# Altium PCB 1000BASET1_MEDIA_CONVERTER.PcbDoc (part 2 of 2)
Units mm, origin at the board's own origin, x right, y up, seen from the top; angles counter-clockwise.
Board outline 96 x 40 mm, 4 copper layers (Top Layer, Mid Layer 1, Mid Layer 2, Bottom Layer), stack 1.586 mm thick; 186 components, 118 nets, 607 pads, 487 vias.
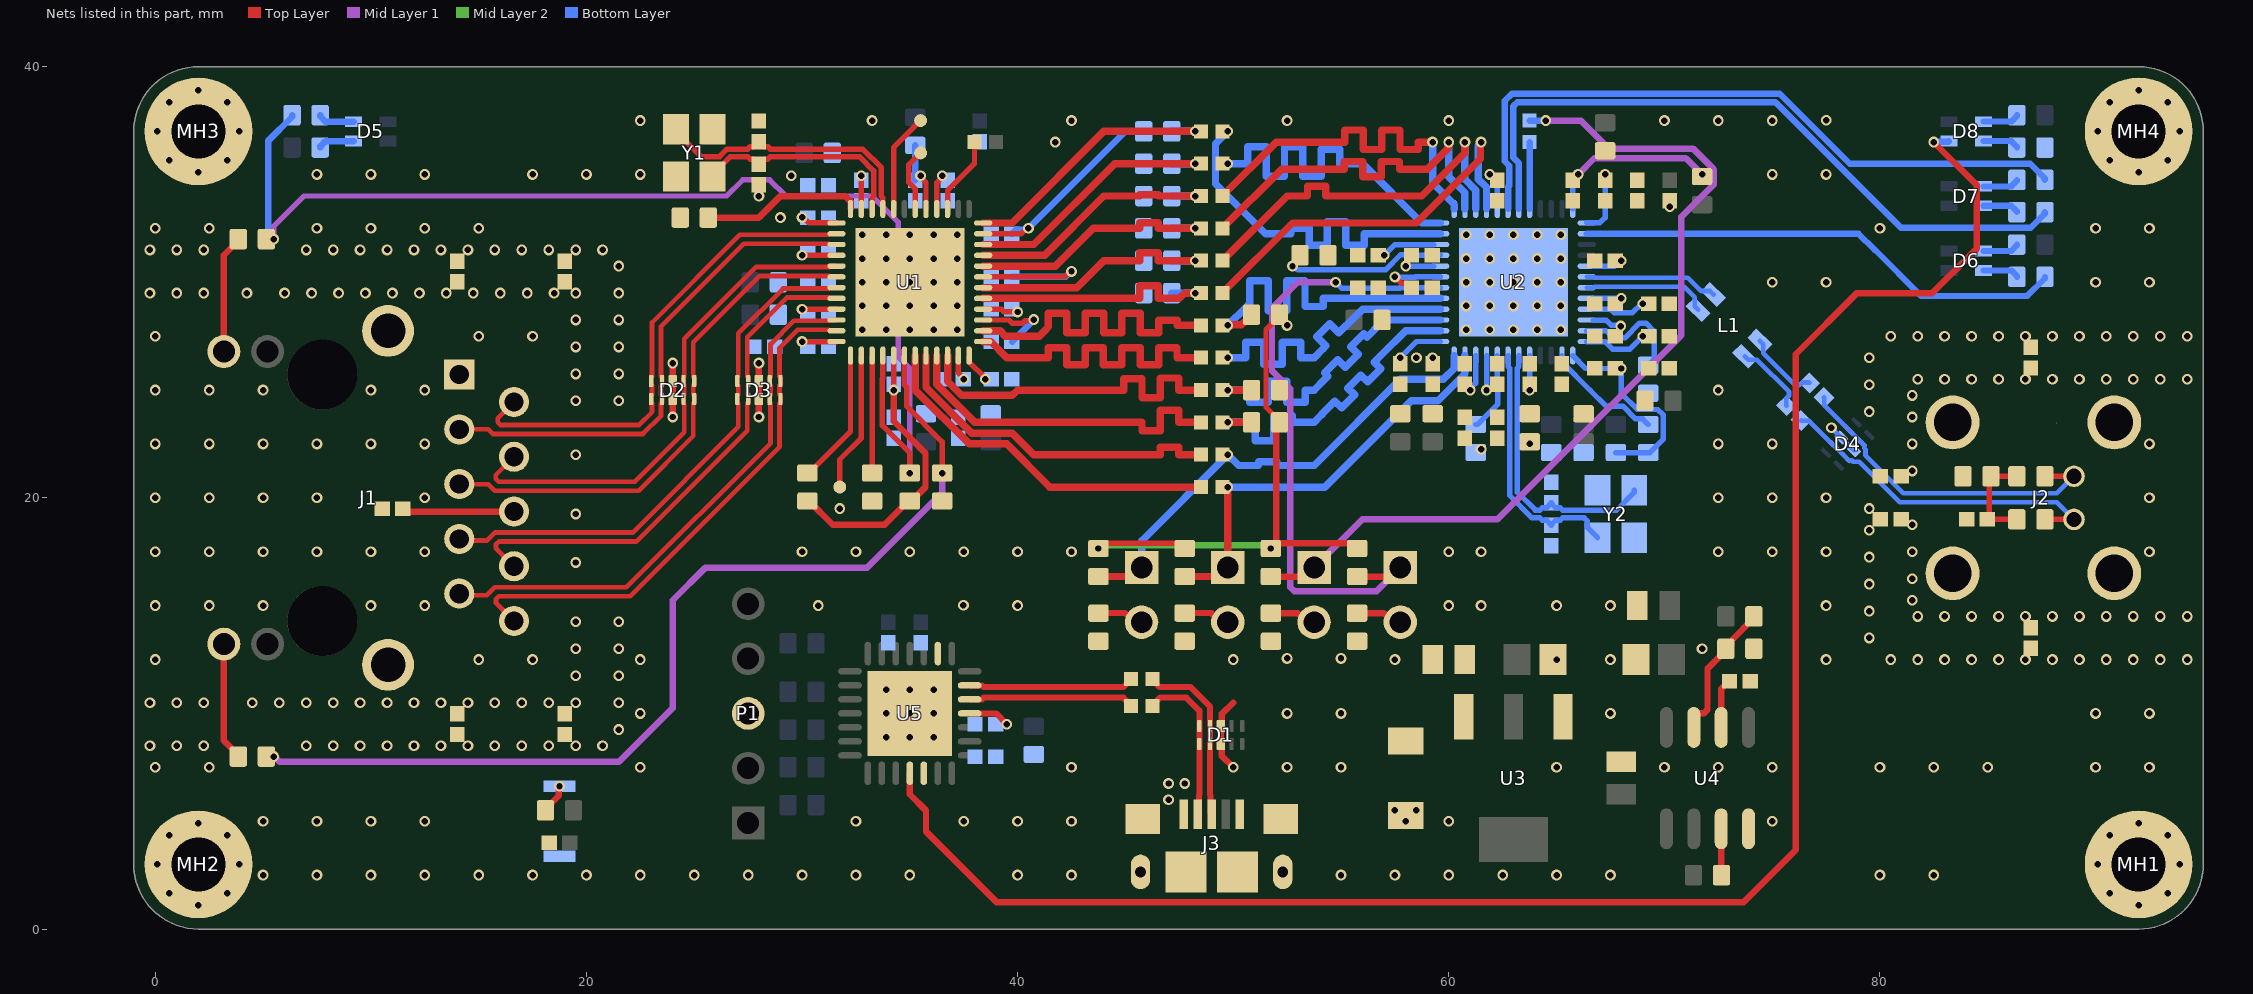
[diagram p4: the nets of this part, all layers, seen from the top]

## Via types
v1: diameter 0.5, hole 0.3, Top Layer to Bottom Layer, tented both sides, 372 vias
v2: diameter 0.5, hole 0.3, Top Layer to Bottom Layer, 115 vias

## Nets (pads, with @x,y where several pads share a name; then routed paths per layer and width w, separated by ;. In a path a pad name is that pad's centre, name@x,y a point inside that pad or via, vN(x,y) a via of type N, cw(c..) or ccw(c..) an arc to the next point about the centre after c; other vN are vias at no path point) (continued)
GND: C2.2 C3.2 C4.2 C5.2 C6.2 C7.2 C8.2 C9.2 C10.2 C11.2 C12.2 C13.2 C14.2 C15.2 C16.2 C17.2 C18.2 C19.2 C20.2 C21.2 C22.2 C23.2 C24.2 C25.2 C26.2 C27.2 C30.2 C31.2 C32.2 C34.2 C35.2 C36.2 C37.2 C38.2 C39.2 C40.2 C41.2 C42.2 C43.2 C44.2 C45.2 C46.2 C47.2 C48.2 C49.2 C50.2 C51.2 C52.2 C53.2 C54.2 C55.2 C56.2 C57.2 C58.2 C59.2 C60.2 C61.2 C62.2 C63.2 C64.2 C65.2 C66.2 C67.2 C68.2 C69.2 C70.2 C81.2 D1.3 D1.8 D2.3 D2.8 D3.3 D3.8 D4.3 D4.8 J3.5 J3.6 J3.7 J3.8 J3.9 J3.10 J3.11 MH1.1 MH1.2 MH1.3 MH1.4 MH1.5 MH1.6 MH1.7 MH2.1 MH2.2 MH2.3 MH2.4 MH2.5 MH2.6 MH2.7 MH3.1 MH3.2 MH3.3 MH3.4 MH3.5 MH3.6 MH3.7 MH4.1 MH4.2 MH4.3 MH4.4 MH4.5 MH4.6 MH4.7 P1.3 R22.1 R23.1 R24.1 R25.1 R27.1 R29.1 R30.1 R35.2 R41.2 R42.2 R45.1 R46.1 R55.1 R56.1 R57.1 R62.2 R69.2 R70.2 R73.1 R75.1 SW1.2 U1.49 U2.49 U3.1 U4.4 U5.5 U5.16 U5.29 Y1.2 Y1.4 Y2.2 Y2.4 | length 10
  Top Layer w0.3: v1(24.005,23.75) 24.002,23.752 24.002,24.58 D2.3@24,24.583 D2.8@24,25.418 24.002,25.42 24.002,26.248 v1(24.005,26.25) ; v1(28,23.75) v1(28,26.25) ; v1(50,7.5) 49.475,8.025 49.475,8.533 D1.3@49.425,8.582 D1.8@49.425,9.417 49.475,9.467 49.475,9.975 50,10.5
  Bottom Layer w0.218: v1(77.75,23.25) D4.8@78.795,22.205
  other v1: 5,2.5 7.5,2.5 10,2.5 12.5,2.5 15,2.5 17.5,2.5 20,2.5 22.5,2.5 25,2.5 27.5,2.5 30,2.5 32.5,2.5 35,2.5 40,2.5 42.5,2.5 55,2.5 57.5,2.5 60,2.5 62.5,2.5 65,2.5 67.5,2.5 80,2.5 82.5,2.5 5,5 7.5,5 10,5 12.5,5 32.5,5 37.5,5 40,5 42.5,5 60,5 75,5 0,7.5 2.5,7.5 22.5,7.5 42.5,7.5 52.5,7.5 55,7.5 65,7.5 70,7.5 72.5,7.5 75,7.5 80,7.5 82.5,7.5 85,7.5 90,7.5 92.5,7.5 -0.25,8.5 1,8.5 2.25,8.5 7,8.5 8.25,8.5 9.5,8.5 10.75,8.5 12,8.5 13.25,8.5 14.5,8.5 15.75,8.5 17,8.5 18.25,8.5 19.5,8.5 20.75,8.5 33.9,8.9 35,8.9 36.1,8.9 21.5,9.25 22.5,10 33.9,10 35,10 36.1,10 52.5,10 55,10 67.5,10 90,10 92.5,10 21.5,10.5 33.9,11.1 35,11.1 36.1,11.1 21.5,11.75 22.5,12.5 50,12.5 57.5,12.5 65,12.5 67.5,12.5 77.5,12.5 80.5,12.5 81.75,12.5 83,12.5 84.25,12.5 85.5,12.5 86.75,12.5 88,12.5 89.25,12.5 90.5,12.5 91.75,12.5 93,12.5 94.25,12.5 52.5,12.55 55,12.55 21.5,13 71.75,13 79.5,13.5 21.5,14.25 79.5,14.75 30.75,15 40,15 60,15 61.5,15 65,15 67.5,15 77.5,15 37.486,15.014 79.5,16 79.5,17.25 30,17.5 32.5,17.5 35,17.5 37.5,17.5 40,17.5 42.5,17.5 60,17.5 61.5,17.5 72.5,17.5 75,17.5 77.5,17.5 79.5,18.5 31.75,19.5 79.5,19.5 72.5,20 75,20 77.5,20 61.5,22.25 72.5,22.5 75,22.5 79.5,24 21.5,24.5 72.5,25 79.5,25.25 21.5,25.75 79.5,26.5 21.5,27 80.5,27.5 81.75,27.5 83,27.5 84.25,27.5 85.5,27.5 86.75,27.5 88,27.5 89.25,27.5 90.5,27.5 91.75,27.5 93,27.5 94.25,27.5 32.8,27.8 33.9,27.8 35,27.8 36.1,27.8 37.2,27.8 60.8,27.8 61.9,27.8 63,27.8 64.1,27.8 65.2,27.8 21.5,28.25 32.8,28.9 33.9,28.9 35,28.9 36.1,28.9 37.2,28.9 60.8,28.9 61.9,28.9 63,28.9 64.1,28.9 65.2,28.9 21.5,29.5 32.8,30 33.9,30 35,30 36.1,30 37.2,30 60.8,30 61.9,30 63,30 64.1,30 65.2,30 75,30 77.5,30 90,30 92.5,30 21.5,30.75 32.8,31.1 33.9,31.1 35,31.1 36.1,31.1 37.2,31.1 60.8,31.1 61.9,31.1 63,31.1 64.1,31.1 65.2,31.1 -0.25,31.5 1,31.5 2.25,31.5 7,31.5 8.25,31.5 9.5,31.5 10.75,31.5 12,31.5 13.25,31.5 14.5,31.5 15.75,31.5 17,31.5 18.25,31.5 19.5,31.5 20.75,31.5 32.8,32.2 33.9,32.2 35,32.2 36.1,32.2 37.2,32.2 60.8,32.2 61.9,32.2 63,32.2 64.1,32.2 65.2,32.2 0,32.5 2.5,32.5 7.5,32.5 10,32.5 12.5,32.5 15,32.5 80,32.5 90,32.5 92.5,32.5 29,33 70.25,33.5 28,34 29.5,34.945 7.5,35 10,35 12.5,35 17.5,35 20,35 22.5,35 75,35 77.5,35 41.75,36.5 22.5,37.5 33.25,37.5 42.5,37.5 52.5,37.5 60,37.5 70,37.5 72.5,37.5 75,37.5 77.514,37.514
LAN8830_ALLPHYAD: R19.2 U1.13 | length 6.3
  Top Layer w0.25: R19.2@30.25,21.15 30.325,21.15 32.25,23.075 U1.13@32.25,26.6
LAN8830_CLK125_EN: R13.1 R30.2 U1.34 | length 12.5
  Top Layer w0.345: U1.34@38.4,31.75 40.75,31.75 44.5,35.5 v2(48.25,35.5)
  Bottom Layer w0.345: R30.2@47.15,35.5 v2(48.25,35.5)
LAN8830_CLK125_NDO: TP3.1 U1.42 | length 2.9
  Top Layer w0.25: U1.42@35.25,33.4 35.25,34.34 34.953,34.637 34.953,35.453 TP3.1@35.5,36
LAN8830_LDO_O: TP1.1 U1.44 | length 4.6
  Top Layer w0.25: U1.44@34.25,33.4 34.25,36.25 TP1.1@35.5,37.5
LAN8830_MAGJACK: TP2.1 U1.14 | length 6.5
  Top Layer w0.25: TP2.1@31.75,20.5 31.75,21.771 32.75,22.771 U1.14@32.75,26.6
LAN8830_MODE0: R7.1 R22.2 U1.33 | length 12.2
  Top Layer w0.345: U1.33@38.4,31.25 41.25,31.25 44,34 45.5,34 45.673,34 45.673,34.061 46.526,34.061 46.526,34 47.5,34 v2(48.25,34)
  Bottom Layer w0.345: R22.2@47.15,34 v2(48.25,34)
LAN8830_MODE1: R8.1 R23.2 U1.32 | length 12.2
  Top Layer w0.345: U1.32@38.4,30.75 41.75,30.75 43.5,32.5 45.491,32.5 45.663,32.5 45.663,32.768 46.516,32.768 46.516,32.5 47,32.5 v2(48.25,32.5)
  Bottom Layer w0.345: R23.2@47.15,32.5 v2(48.25,32.5)
LAN8830_MODE2: R9.1 R24.2 U1.30 | length 12.2
  Top Layer w0.345: U1.30@38.4,29.75 42.75,29.75 44,31 45.5,31 45.673,31 45.673,31.371 46.526,31.371 46.526,31 47,31 v2(48.25,31)
  Bottom Layer w0.345: R24.2@47.15,31 v2(48.25,31)
LAN8830_MODE3: R10.1 R25.2 U1.29 | length 12.2
  Top Layer w0.345: U1.29@38.4,29.25 45.5,29.25 45.673,29.25 45.673,29.828 46.526,29.828 46.526,29.25 47.125,29.25 47.5,29.25 47.75,29.5 v2(48.25,29.5)
  Bottom Layer w0.345: R25.2@47.15,29.5 v2(48.25,29.5)
LAN8830_MODE4: R11.1 R21.2 U1.36 | length 12.7
  Top Layer w0.345: U1.36@38.4,32.75 39.75,32.75 44,37 v2(48.25,37)
  Bottom Layer w0.345: R21.2@47.15,37 v2(48.25,37)
LAN8830_PHYAD0: R14.1 R27.2 U1.18 | length 46.4
  Top Layer w0.25: U1.18@34.75,26.6 34.75,25.242 34.85,25.142 34.85,24.25 36.5,22.6 v2(36.5,21.15)
  Mid Layer 1 w0.3: v2(5.5,8) 5.526,8 5.776,7.75 21.5,7.75 24,10.25 24,15.25 25.5,16.75 33,16.75 36.5,20.25 v2@36.5,21.25
LAN8830_PHYAD1: R12.1 R20.2 R26.2 U1.16 | length 55.4
  Top Layer w0.25: U1.16@33.75,26.6 33.75,25.554 33.725,25.529 33.725,23.353 35,22.078 v2(35,21.15)
  Mid Layer 1 w0.25: v2(5.5,32) 5.5,32.6 6.9,34 26.5,34 27.25,34.75 28.5,34.75 29.25,34 33.25,34 34.469,32.781 34.469,26.531 35,26 v2(35,21.15)
  Bottom Layer w0.3: v2(5.5,32) 5.5,32.026 5.25,32.276 5.25,36.575 6.35,37.675 R26.2@6.35,37.75
LAN8830_PHYAD2: R29.2 U1.15 | length 5.5
  Top Layer w0.25: R29.2@33.25,21.15 U1.15@33.25,26.6
LAN8830_TXRXA_N: D2.2 D2.9 J1.P3 U1.3 | length 23.8
  Top Layer w0.218: J1.P3@14.1,23.175 15.446,23.175 15.658,22.963 22.622,22.963 23.459,23.8 23.459,24.377 23.5,24.418 D2.2@23.5,24.583 23.5,24.747 23.459,24.788 23.459,25.212 23.5,25.253 D2.9@23.5,25.418 23.5,25.582 23.459,25.623 23.459,27.959 27.291,31.791 31.25,31.791 31.291,31.75 U1.3@31.6,31.75
LAN8830_TXRXA_P: D2.1 D2.10 J1.P2 U1.2 | length 23.2
  Top Layer w0.218: J1.P2@16.64,24.445 15.884,23.689 15.884,23.509 16.012,23.381 22.449,23.381 23.041,23.973 23.041,24.377 23,24.418 D2.1@23,24.583 23,24.747 23.041,24.788 23.041,25.212 23,25.253 D2.10@23,25.418 23,25.582 23.041,25.623 23.041,28.132 27.118,32.209 31.25,32.209 31.291,32.25 U1.2@31.6,32.25
LAN8830_TXRXB_N: D2.5 D2.6 J1.P5 U1.6 | length 24.4
  Top Layer w0.218: J1.P5@14.1,20.635 15.446,20.635 15.749,20.333 22.424,20.333 24.959,22.868 24.959,24.377 25,24.418 D2.5@25,24.583 25,24.747 24.959,24.788 24.959,25.212 25,25.253 D2.6@25,25.418 25,25.582 24.959,25.623 24.959,27.209 28.041,30.291 31.25,30.291 31.291,30.25 U1.6@31.6,30.25
LAN8830_TXRXB_P: D2.4 D2.7 J1.P4 U1.5 | length 24
  Top Layer w0.218: J1.P4@16.64,21.905 15.794,21.059 15.794,20.878 15.922,20.751 22.251,20.751 24.541,23.041 24.541,24.377 24.5,24.418 D2.4@24.5,24.583 24.5,24.747 24.541,24.788 24.541,25.212 24.5,25.253 D2.7@24.5,25.418 24.5,25.582 24.541,25.623 24.541,27.382 27.868,30.709 31.25,30.709 31.291,30.75 U1.5@31.6,30.75
LAN8830_TXRXC_N: D3.2 D3.9 J1.P8 U1.8 | length 24.5
  Top Layer w0.218: J1.P8@16.64,16.825 15.8,17.665 15.8,17.845 15.928,17.973 22.314,17.973 27.459,23.118 27.459,24.377 27.5,24.418 D3.2@27.5,24.583 27.5,24.747 27.459,24.788 27.459,25.212 27.5,25.253 D3.9@27.5,25.418 27.5,25.582 27.459,25.623 27.459,27.459 29.291,29.291 31.25,29.291 31.291,29.25 U1.8@31.6,29.25
LAN8830_TXRXC_P: D3.1 D3.10 J1.P7 U1.7 | length 25
  Top Layer w0.218: J1.P7@14.1,18.095 14.175,18.02 15.384,18.02 15.755,18.391 22.141,18.391 27.041,23.291 27.041,24.377 27,24.418 D3.1@27,24.583 27,24.747 27.041,24.788 27.041,25.212 27,25.253 D3.10@27,25.418 27,25.582 27.041,25.623 27.041,27.632 29.118,29.709 31.25,29.709 31.291,29.75 U1.7@31.6,29.75
LAN8830_TXRXD_N: D3.5 D3.6 J1.P10 U1.11 | length 25.1
  Top Layer w0.218: J1.P10@16.64,14.285 15.8,15.125 15.8,15.305 15.928,15.433 22.024,15.433 28.959,22.368 28.959,24.377 29,24.418 D3.5@29,24.583 29,24.747 28.959,24.788 28.959,25.212 29,25.253 D3.6@29,25.418 29,25.582 28.959,25.623 28.959,26.959 29.791,27.791 31.25,27.791 31.291,27.75 U1.11@31.6,27.75
LAN8830_TXRXD_P: D3.4 D3.7 J1.P9 U1.10 | length 25.6
  Top Layer w0.218: J1.P9@14.1,15.555 14.175,15.48 15.384,15.48 15.755,15.851 21.851,15.851 28.541,22.541 28.541,24.377 28.5,24.418 D3.4@28.5,24.583 28.5,24.747 28.541,24.788 28.541,25.212 28.5,25.253 D3.7@28.5,25.418 28.5,25.582 28.541,25.623 28.541,27.132 29.618,28.209 31.25,28.209 31.291,28.25 U1.10@31.6,28.25
LAN8830_X25_N: C8.1 U1.45 Y1.3 | length 12.8
  Top Layer w0.25: Y1.3@24.15,37.1 24.15,37 25.323,35.827 26.179,35.827 26.529,36.176 27.473,36.176 27.586,36.289 27.789,36.289 C8.1@28,36.5 ; C8.1@28,36.521 C8.1@28,36.5 ; U1.45@33.75,33.4 33.75,33.907 33.676,33.981 33.676,35.314 32.814,36.176 28.527,36.176 28.414,36.289 28.211,36.289 C8.1@28,36.5
LAN8830_X25_P: C7.1 U1.46 Y1.1 | length 10.3
  Top Layer w0.25: Y1.1@25.85,34.9 25.85,35 26.325,35.475 26.674,35.824 27.473,35.824 27.586,35.711 27.789,35.711 C7.1@28,35.5 ; C7.1@28,35.479 C7.1@28,35.5 ; U1.46@33.25,33.4 33.25,33.907 33.324,33.981 33.324,35.168 32.668,35.824 28.527,35.824 28.414,35.711 28.211,35.711 C7.1@28,35.5
LAN8870_LED2: R53.2 U2.31 | length 32.4
  Bottom Layer w0.3: U2.31@63.25,33.4 63.25,35.528 63,35.778 63,38.173 63.176,38.348 75.152,38.348 80.977,32.523 86.998,32.523 87.65,33.175 R53.2@87.65,33.25
LAN8870_LED3: R54.2 U2.30 | length 32
  Bottom Layer w0.3: U2.30@62.75,33.4 62.75,34.426 62.8,34.476 62.8,35.41 62.598,35.611 62.598,38.416 62.932,38.75 75.35,38.75 78.6,35.5 86.975,35.5 87.65,34.825 R54.2@87.65,34.75
LAN8870_LINK_LED: R49.2 U2.38 | length 22.9
  Bottom Layer w0.283: U2.38@66.4,32.25 79,32.25 79.75,31.5 79.771,31.5 81.902,29.368 86.843,29.368 87.65,30.175 R49.2@87.65,30.25
LAN8870_MODE_STRP: J5.1 R52.1 U2.18 | length 29.5
  Top Layer w0.3: R52.1@55.75,16.35 57.33,16.35 J5.1@57.75,16.77
  Mid Layer 1 w0.3: v2(54.75,30) 53,30 51.8,28.8 51.8,25.9 52.65,25.05 52.65,15.851 52.826,15.675 56.655,15.675 J5.1@57.75,16.77
  Bottom Layer w0.25: v2(54.75,30) 55.025,29.725 57.717,29.725 57.742,29.75 U2.18@59.6,29.75
LAN8870_RXCTL: R6.2 R44.2 U2.17 | length 17
  Top Layer w0.345: v2(49.75,28) 49.78,28.03 50.38,28.03 50.548,28.198 50.623,28.198 50.85,28.425 R44.2@50.85,28.5
  Bottom Layer w0.345: v2(49.75,28) 50.6,28.85 50.772,29.022 50.772,30.071 51.625,30.071 51.625,28.668 52.478,28.668 52.478,30.071 53.331,30.071 53.331,28.875 54.184,28.875 54.184,29.25 55.519,29.25 U2.17@59.6,29.25
LAN8870_RXD0: J7.1 R1.2 R50.1 U2.11 | length 19.9
  Top Layer w0.345: R50.1@47.75,16.35 49.33,16.35 J7.1@49.75,16.77 v2(49.75,20.5)
  Bottom Layer w0.345: v2(49.75,20.5) 54.25,20.5 58.25,24.5 59.5,24.5 60.75,25.75 U2.11@60.75,26.6
LAN8870_RXD1: J6.1 R2.2 R48.1 U2.12 | length 22.6
  Top Layer w0.345: R48.1@43.75,16.35 45.33,16.35 J6.1@45.75,16.77
  Bottom Layer w0.345: J6.1@45.75,16.77 45.75,18 v2(49.75,22) 50.25,21.5 51,21.5 51.173,21.5 51.173,21.677 52.026,21.677 52.026,21.5 52.5,21.5 53.75,21.5 57.75,25.5 59.75,25.5 60.25,26 U2.12@60.25,26.6
LAN8870_RXD2: R3.2 R47.1 U2.14 | length 16.8
  Top Layer w0.345: v2(49.75,23.5) R47.1@50.85,23.5
  Bottom Layer w0.345: v2(49.75,23.5) 50,23.5 51.026,23.5 51.026,22.654 51.879,22.654 51.879,23.814 52.732,23.814 52.732,23.5 53.489,23.5 53.75,23.5 54,23.75 54.122,23.872 54.112,23.882 54.715,24.485 55.029,24.171 55.632,24.774 55.318,25.088 55.921,25.692 56.232,25.381 56.835,25.984 56.535,26.285 56.875,26.625 58,27.75 U2.14@59.6,27.75
LAN8870_RXD3: R4.2 R55.2 U2.15 | length 16.8
  Top Layer w0.345: v2(49.75,25) R55.2@50.85,25
  Bottom Layer w0.345: v2(49.75,25) 50.776,25 50.776,24.443 51.629,24.443 51.629,25.415 52.482,25.415 52.482,24.443 53.335,24.443 53.335,25 53.75,25 54.254,25.504 54.275,25.525 54.397,25.647 54.244,25.8 54.847,26.403 55.193,26.057 55.796,26.66 55.45,27.006 56.053,27.609 56.206,27.456 56.825,28.075 57,28.25 U2.15@59.6,28.25
LAN8870_SPEED_SEL: J4.1 R43.1 R64.2 | length 41.5
  Top Layer w0.3: R43.1@51.75,16.35 53.33,16.35 J4.1@53.75,16.77
  Mid Layer 1 w0.3: J4.1@53.75,16.77 55.98,19 62.25,19 70.781,27.531 70.781,33.031 72.298,34.548 72.298,35.229 71.328,36.2 67.425,36.2 66.125,37.5 v2(64.5,37.5)
  Bottom Layer w0.3: R64.2@63.75,37.5 v2(64.5,37.5)
LAN8870_VBAT: C55.1 C56.1 R58.1 R59.1 R67.2 U2.1 | length 9.6
  Bottom Layer w0.25: R59.1@67.75,22.1 R58.1@69.25,22.1 69.325,22.1 69.952,22.727 69.952,23.835 69.687,24.1 68.75,24.1 68,24.85 v2(68,26)
  Bottom Layer w0.254: U2.1@65.75,26.6 66.35,26 v2(68,26)
LAN8870_VDDA: C50.1 C51.1 C52.1 C53.1 C54.1 R60.1 R66.2 U2.37 U2.41 U2.45 U2.48 | length 9.9
  Bottom Layer w0.254: U2.48@66.4,27.25 67.25,27.25 67.6,26.9 68.4,26.9 v2(69,27.5) ; U2.37@66.4,32.75 67,32.75 67.25,33 v2(67.25,35) ; U2.45@66.698,28.748 67.505,28.748 67.666,28.587 68.521,28.587 68.933,29 v2(69,29) ; U2.41@66.698,30.75 67.683,30.75 67.933,31 v2(68,31)
  other v2: 63.75,22.5
LAN8870_VDDIO: C57.1 C58.1 C59.1 C60.1 R39.1 R43.2 R44.1 R47.2 R48.2 R50.2 R52.2 R68.2 U2.13 U2.20 U2.36 | length 39.3
  Top Layer w0.25: v2(43.75,17.65) 44,17.9 47.5,17.9 R50.2@47.75,17.65 ; R47.2@52.15,23.5 52.15,23.575 51.523,24.202 51.523,27.798 52.15,28.425 R44.1@52.15,28.5
  Top Layer w0.3: v2(51.75,17.65) R43.2@52,17.9 ; R47.2@52.15,23.5 52,23.35 R43.2@52,17.9 ; R52.2@55.75,17.65 55.5,17.9 R43.2@52,17.9
  Mid Layer 1 w0.3: v2(66,35) 66.75,35.75 71,35.75 71.748,35.002 v2(71.748,35)
  Mid Layer 2 w0.3: v2(43.75,17.65) 43.804,17.65 43.951,17.797 51.549,17.797 51.696,17.65 v2(51.75,17.65)
  Bottom Layer w0.25: v2(57.75,26.5) 58.5,27.25 U2.13@59.6,27.25
  Bottom Layer w0.254: v2(58,30.75) U2.20@59.302,30.75 ; U2.36@65.75,33.4 65.75,34.683 66,34.933 v2(66,35)
  other v2: 58.5,26.5 59.25,26.5 52.5,28
LAN8870_X25_N: C37.1 U2.7 Y2.3 | length 11.9
  Bottom Layer w0.25: U2.7@62.75,26.6 62.75,26.093 62.824,26.019 62.824,20.12 63.87,19.074 64.223,19.074 64.336,18.961 64.539,18.961 C37.1@64.75,18.75 ; C37.1@64.75,18.729 C37.1@64.75,18.75 ; Y2.3@66.9,18.15 66.425,18.625 66.425,18.925 66.279,19.072 66.061,19.072 66.058,19.074 65.277,19.074 65.164,18.961 64.961,18.961 C37.1@64.75,18.75
LAN8870_X25_P: C36.1 U2.6 Y2.1 | length 12.9
  Bottom Layer w0.25: U2.6@63.25,26.6 63.25,26.093 63.176,26.019 63.176,20.266 64.016,19.426 64.223,19.426 64.336,19.539 64.539,19.539 C36.1@64.75,19.75 ; C36.1@64.75,19.771 C36.1@64.75,19.75 ; Y2.1@68.6,20.35 68.6,20.25 67.773,19.423 66.206,19.423 66.204,19.426 65.277,19.426 65.164,19.539 64.961,19.539 C36.1@64.75,19.75
MATENET_GND: C30.1 C31.1 C32.1 C33.1 C34.1 J2.3 R40.2
  other v1: 81.75,14.5 83,14.5 84.25,14.5 85.5,14.5 86.75,14.5 88,14.5 89.25,14.5 90.5,14.5 91.75,14.5 93,14.5 94.25,14.5 81.5,15.25 81.5,16.25 81.5,17.5 92.5,17.5 81.5,18.75 92.5,20 81.5,21.25 81.5,22.5 92.5,22.5 81.5,23.75 81.5,24.75 81.75,25.5 83,25.5 84.25,25.5 85.5,25.5 86.75,25.5 88,25.5 89.25,25.5 90.5,25.5 91.75,25.5 93,25.5 94.25,25.5
MCU_G_LED: D8.2 U5.4 | length 85.6
  Top Layer w0.3: U5.4@35,7.225 35,6.25 35.75,5.5 35.75,4.518 39.018,1.25 73.682,1.25 76.098,3.666 76.098,26.666 78.932,29.5 82.432,29.5 84.5,31.568 84.5,34.5 v2(82.5,36.5)
  Bottom Layer w0.3: v2(82.5,36.5) 82.525,36.525 83.175,36.525 D8.2@83.2,36.55
NetC1_1: C1.1 J1.P6 | length 5.2
  Top Layer w0.3: C1.1@11.479,19.5 11.614,19.365 J1.P6@16.64,19.365
NetC15_1: C15.1 C16.1 C17.1 C18.1 C19.1 R32.2 U1.23 U1.27 U1.31 U1.40 | length 13.8
  Top Layer w0.25: U1.40@36.25,33.4 36.25,34.628 36.5,34.878 v2(36.5,34.945) ; U1.23@37.25,26.6 37.25,25.8 37.5,25.55 v2(37.5,25.5) ; U1.27@38.4,28.25 39.6,28.25 39.754,28.096 40.217,28.096 40.343,28.221 40.702,28.221 v2(40.75,28.269) ; U1.31@38.4,30.25 42.182,30.25 42.432,30.5 v2(42.5,30.5)
  Bottom Layer w0.3: C17.1@39.75,27.25 40.75,28.25 v2(40.75,28.269) ; C18.1@39.75,30.25 42.224,30.25 42.474,30.5 v2(42.5,30.5)
NetC20_1: C20.1 C21.1 R33.2 U1.47 | length 1.5
  Top Layer w0.254: U1.47@32.75,33.4 v2(32.75,34.945)
NetC22_1: C22.1 C23.1 C24.1 R34.2 U1.1 U1.12 | length 3.3
  Top Layer w0.254: v2(30,27.25) U1.12@31.6,27.25 ; v2(30,33.009) 30.067,33.009 30.326,32.75 U1.1@31.6,32.75
NetC25_1: C25.1 C26.1 C27.1 R36.2 U1.4 U1.9 | length 3.2
  Top Layer w0.25: v2(30,31.25) U1.4@31.6,31.25
  Top Layer w0.254: v2(30,28.75) U1.9@31.6,28.75
NetC33_2: C33.2 R37.1 R38.1 R40.1 | length 4.6
  Top Layer w0.25: R38.1@86.35,19 C33.2@84.979,19 85.064,19.086 85.064,20.914 R40.1@85.15,21 R37.1@86.35,21
NetC38_1: C38.1 C39.1 R60.2 U2.9 | length 1.6
  Bottom Layer w0.254: v2(61.75,25) U2.9@61.75,26.6
NetC40_1: C40.1 C41.1 C42.1 C43.1 R61.2 U2.10 U2.19 U2.29 | length 6.2
  Top Layer w0.25: v2(57.5,30.25) 57.789,29.961 58.06,29.961 C42.1@58.271,29.75
  Bottom Layer w0.25: v2(57.5,30.25) 57.525,30.225 58.445,30.225 58.47,30.25 U2.19@59.6,30.25
  Bottom Layer w0.254: v2(61,25) 61,25.067 61.25,25.317 U2.10@61.25,26.6 ; v2(61.9,35) 61.9,34.933 62.25,34.583 U2.29@62.25,33.698
NetC44_1: C44.1 C45.1 C46.1 C47.1 R63.2 U2.5 U2.44 U2.46 | length 4.3
  Bottom Layer w0.254: v2(63.75,25) U2.5@63.75,26.6 ; U2.46@66.698,28.248 67.296,28.248 67.528,28.016 67.93,28.016 v2(67.977,27.969) ; U2.44@66.698,29.25 v2(68,29.25)
NetC48_1: C48.1 C49.1 R65.2 U2.22 | length 2.5
  Bottom Layer w0.254: v2(57,31.25) 57.5,31.75 U2.22@59.302,31.75
NetC61_1: C61.1 F1.2 U3.3
NetC65_1: C65.1 U4.6 | length 2.3
  Top Layer w0.3: U4.6@72.635,9.35 72.635,11.135 73,11.5 C65.1@73.021,11.5
NetC66_1: C66.1 C67.1 R82.2 U5.11 | length 1.9
  Top Layer w0.283: U5.11@37.775,10 39,10 v2(39.5,9.5)
NetD5_1: D5.1 R26.1 | length 1.7
  Bottom Layer w0.3: R26.1@7.65,37.75 7.65,37.7 7.9,37.45 D5.1@9.2,37.45
NetD5_4: D5.4 R28.1 | length 1.7
  Bottom Layer w0.3: R28.1@7.65,36.25 7.65,36.3 7.9,36.55 D5.4@9.2,36.55
NetD6_1: D6.1 R49.1 | length 1.7
  Bottom Layer w0.283: D6.1@84.8,30.55 86.091,30.55 86.35,30.292 R49.1@86.35,30.25
NetD6_4: D6.4 R51.1 | length 1.7
  Bottom Layer w0.283: D6.4@84.8,31.45 86.091,31.45 86.35,31.709 R51.1@86.35,31.75
NetD7_1: D7.1 R53.1 | length 1.7
  Bottom Layer w0.283: D7.1@84.8,33.55 86.091,33.55 86.35,33.292 R53.1@86.35,33.25
NetD7_4: D7.4 R54.1 | length 1.7
  Bottom Layer w0.283: D7.4@84.8,34.45 86.091,34.45 86.35,34.709 R54.1@86.35,34.75
NetD8_1: D8.1 R75.2 | length 1.7
  Bottom Layer w0.283: D8.1@84.8,36.55 86.092,36.55 86.35,36.292 R75.2@86.35,36.25
NetD8_4: D8.4 R76.2 | length 1.7
  Bottom Layer w0.283: D8.4@84.8,37.45 86.092,37.45 86.35,37.709 R76.2@86.35,37.75
NetF1_1: F1.1 J3.1
  other v2: 58,5 57.5,5.5 58.5,5.5 47,6 47,6.75 47.75,6.75
NetJ1_L1: J1.L1 R14.2 | length 5.5
  Top Layer w0.3: J1.L1@3.18,13.215 3.18,8.745 3.85,8.075 R14.2@3.85,8
NetJ1_L3: J1.L3 R12.2 | length 5.5
  Top Layer w0.3: J1.L3@3.18,26.785 3.18,31.255 3.85,31.925 R12.2@3.85,32
NetJ4_2: J4.2 R45.2 | length 2.2
  Top Layer w0.3: R45.2@51.75,14.65 52.992,14.65 53.412,14.23 J4.2@53.75,14.23
NetJ5_2: J5.2 R46.2 | length 2.2
  Top Layer w0.3: R46.2@55.75,14.65 56.992,14.65 57.412,14.23 J5.2@57.75,14.23
NetJ6_2: J6.2 R56.2 | length 2.2
  Top Layer w0.283: R56.2@43.75,14.65 44.987,14.65 45.407,14.23 J6.2@45.75,14.23
NetJ7_2: J7.2 R57.2 | length 2.2
  Top Layer w0.283: R57.2@47.75,14.65 48.987,14.65 49.407,14.23 J7.2@49.75,14.23
NetR1_1: R1.1 U1.19 | length 16.7
  Top Layer w0.345: U1.19@35.25,26.6 35.25,24.999 37.749,22.5 39.5,22.5 41.5,20.5 R1.1@48.5,20.5
NetR2_1: R2.1 U1.20 | length 16.2
  Top Layer w0.345: U1.20@35.75,26.6 35.75,25.132 37.882,23 39.75,23 40.75,22 46.621,22 46.621,22.349 47.474,22.349 47.474,22 R2.1@48.5,22
NetR3_1: R3.1 U1.21 | length 16.2
  Top Layer w0.345: U1.21@36.25,26.6 36.25,25.264 38.014,23.5 40.75,23.5 45.768,23.5 45.768,23.106 46.621,23.106 46.621,24.054 47.474,24.054 47.474,23.5 R3.1@48.5,23.5
NetR4_1: R4.1 U1.22 | length 16.2
  Top Layer w0.345: U1.22@36.75,26.6 36.75,25.396 37.396,24.75 39.75,24.75 40,25 41.25,25 44.915,25 44.915,25.525 45.768,25.525 45.768,24.638 46.621,24.638 46.621,25.558 47.474,25.558 47.474,25 R4.1@48.5,25
NetR5_1: R5.1 U1.25 | length 16.2
  Top Layer w0.345: U1.25@38.4,27.25 38.75,27.25 39.5,26.5 41.25,26.5 41.423,26.5 41.423,26.97 42.276,26.97 42.276,26.164 43.129,26.164 43.129,26.97 43.982,26.97 43.982,26.164 44.835,26.164 44.835,26.97 45.688,26.97 45.688,26.164 46.541,26.164 46.541,26.97 47.394,26.97 47.394,26.5 48.25,26.5 R5.1@48.5,26.5
NetR5_2: R5.2 U2.16 | length 15.4
  Bottom Layer w0.345: v2(49.75,26.5) 50.4,26.5 50.573,26.5 50.573,27.212 51.426,27.212 51.426,26.195 52.279,26.195 52.279,27.212 53.132,27.212 53.132,26.5 53.6,26.5 53.75,26.5 54.175,26.925 54.297,27.047 53.871,27.473 54.474,28.077 54.9,27.65 55.625,28.375 56,28.75 U2.16@59.6,28.75
NetR6_1: R6.1 U1.26 | length 16.4
  Top Layer w0.345: U1.26@38.4,27.75 39.186,27.75 39.436,27.5 41,27.5 41.254,27.754 41.426,27.926 41.426,28.561 42.279,28.561 42.279,27.65 43.132,27.65 43.132,28.561 43.985,28.561 43.985,27.65 44.838,27.65 44.838,28.561 45.691,28.561 45.691,27.65 46.544,27.65 46.544,28.229 47.397,28.229 47.397,28 R6.1@48.5,28
NetR7_2: R7.2 U2.25 | length 17.9
  Top Layer w0.345: R7.2@49.5,34 52,36.5 55.005,36.5 55.178,36.5 55.178,37.062 56.031,37.062 56.031,36.158 56.884,36.158 56.884,37.062 57.737,37.062 57.737,36.158 58.59,36.158 58.59,36.5 v2(59.25,36.5)
  Bottom Layer w0.345: v2(59.25,36.5) 59.25,34.605 60.25,33.605 U2.25@60.25,33.4
NetR8_2: R8.2 U2.26 | length 17.8
  Top Layer w0.345: R8.2@49.5,32.5 52.25,35.25 54.983,35.25 55.155,35.25 55.155,35.601 56.008,35.601 56.008,34.899 56.861,34.899 56.861,35.601 57.714,35.601 57.714,35.25 58.057,35.25 59,35.25 59.97,36.22 59.97,36.47 v2(60,36.5)
  Bottom Layer w0.345: v2(60,36.5) 60,34.894 60.75,34.144 U2.26@60.75,33.4
NetR9_2: R9.2 U2.27 | length 18
  Top Layer w0.345: R9.2@49.5,31 52.5,34 53.274,34 53.447,34 53.447,34.457 54.3,34.457 54.3,34 58.5,34 58.75,34 60.75,36 v2(60.75,36.5)
  Bottom Layer w0.345: v2(60.75,36.5) 60.75,34.776 61.25,34.276 U2.27@61.25,33.4
NetR10_2: R10.2 U2.28 | length 18.6
  Top Layer w0.345: R10.2@49.5,29.5 52.75,32.75 58.5,32.75 61.47,35.72 61.47,36.47 v2(61.5,36.5)
  Bottom Layer w0.345: v2(61.5,36.5) 61.5,36.458 61.376,36.334 61.376,34.783 61.75,34.408 U2.28@61.75,33.4
NetR11_2: R11.2 U2.23 | length 17.8
  Bottom Layer w0.345: v2(49.75,37) 49.177,36.427 49.177,34.573 51.5,32.25 51.594,32.25 52.665,32.25 52.665,32.504 53.518,32.504 53.518,31.718 54.371,31.718 54.371,32.804 55.224,32.804 55.224,31.718 56.077,31.718 56.077,32.25 56.25,32.25 U2.23@59.6,32.25
NetR13_2: R13.2 U2.24 | length 17.8
  Bottom Layer w0.345: v2(49.75,35.5) 50.5,35.5 50.673,35.5 50.673,36.292 51.526,36.292 51.526,34.923 52.379,34.923 52.379,36.292 53.232,36.292 53.232,34.923 54.085,34.923 54.085,36.173 54.938,36.173 54.938,35.5 55.763,35.5 56,35.5 58.75,32.75 U2.24@59.6,32.75
NetR18_2: R18.2 U1.39 | length 3.6
  Top Layer w0.25: U1.39@36.75,33.4 36.75,34.25 38,35.5 R18.2@38,36.5
NetR35_1: R35.1 U1.48 | length 7.5
  Top Layer w0.3: R35.1@25.65,33 28,33 29,34 32,34 32.25,33.75 U1.48@32.25,33.4
NetR42_1: R42.1 U2.8 | length 3.7
  Bottom Layer w0.25: R42.1@61.25,23.4 61.325,23.4 62.275,24.35 62.275,25.529 62.25,25.554 U2.8@62.25,26.6
NetR58_2: R58.2 U2.2 | length 5.5
  Bottom Layer w0.25: U2.2@65.25,26.6 65.25,26.3 66.563,24.987 67.3,24.25 68.075,24.25 68.664,23.661 68.989,23.661 R58.2@69.25,23.4
NetR64_1: R64.1 U2.32 | length 3.1
  Bottom Layer w0.3: U2.32@63.75,33.4 R64.1@63.75,36.5
NetR69_1: R69.1 U2.47 | length 5.4
  Bottom Layer w0.25: U2.47@66.4,27.75 67.294,27.75 67.623,27.421 68.171,27.421 68.85,28.1 69.15,28.1 69.525,27.725 69.525,26.425 R69.1@69.25,26.15
NetR70_1: R70.1 U2.21 | length 7.2
  Bottom Layer w0.25: v2(52.75,30.75) 52.818,30.75 52.993,30.575 57.067,30.575 57.767,31.275 58.529,31.275 58.554,31.25 U2.21@59.6,31.25
NetR71_1: R71.1 R73.2 U4.7 | length 6.5
  Top Layer w0.3: U4.7@71.365,9.35 71.365,9.863 71.504,10.001 71.824,10.001 72,10.177 72,12.075 73.1,13.175 73.1,13.375 74.15,14.425 R71.1@74.15,14.5
NetR72_2: R72.2 U4.3 | length 2.2
  Top Layer w0.3: U4.3@72.635,4.65 72.642,4.643 72.642,2.508 R72.2@72.65,2.5
NetR77_2: R77.2 SW1.1 | length 1.4
  Top Layer w0.3: R77.2@18.1,5.5 18.1,5.575 18.712,6.187 18.712,6.587 v2(18.75,6.625)
RJ45_GND: C1.2 C2.1 C3.1 C4.1 C5.1 J1.P1 J1.S1 J1.S2
  other v1: -0.25,10.5 1,10.5 2.25,10.5 4.5,10.5 5.75,10.5 7,10.5 8.25,10.5 9.5,10.5 10.75,10.5 12,10.5 13.25,10.5 14.5,10.5 15.75,10.5 17,10.5 18.25,10.5 19.5,10.5 19.5,11.75 0,12.5 15,12.5 17.5,12.5 19.5,13 19.5,14.25 0,15 2.5,15 5,15 10,15 12.5,15 19.5,17 0,17.5 2.5,17.5 5,17.5 7.5,17.5 10,17.5 12.5,17.5 19.5,19.25 0,20 2.5,20 5,20 7.5,20 12.5,20 19.5,22 0,22.5 2.5,22.5 5,22.5 7.5,22.5 10,22.5 12.5,22.5 19.5,24.5 0,25 2.5,25 5,25 10,25 12.5,25 19.5,25.75 19.5,27 0,27.5 15,27.5 17.5,27.5 19.5,28.25 -0.25,29.5 1,29.5 2.25,29.5 4.25,29.5 6,29.5 7.25,29.5 8.5,29.5 9.75,29.5 11,29.5 12.25,29.5 13.5,29.5 14.75,29.5 16,29.5 17.25,29.5 18.5,29.5 19.5,29.5
TRX_CON_N: C29.2 D4.4 D4.7 J2.2 R37.2 | length 15.6
  Top Layer w0.25: R37.2@87.65,21 J2.2@89,21
  Bottom Layer w0.218: C29.2@77.404,24.656 77.419,24.641 77.419,24.3 78.558,23.162 D4.4@78.558,23.149 D4.7@79.149,22.558 79.265,22.442 79.265,22.316 79.327,22.255 79.327,21.969 81.087,20.209 88.209,20.209 J2.2@89,21
TRX_CON_P: C28.2 D4.2 D4.9 J2.1 R38.2 | length 15.7
  Top Layer w0.25: R38.2@87.65,19 J2.1@89,19
  Bottom Layer w0.218: C28.2@76.344,23.596 76.359,23.581 76.7,23.581 77.839,22.442 D4.2@77.851,22.442 D4.9@78.442,21.851 ; D4.9@78.571,21.735 78.684,21.735 78.745,21.673 79.031,21.673 80.913,19.791 88.209,19.791 J2.1@89,19
TRX_N: L1.2 U2.42 | length 6.2
  Bottom Layer w0.218: U2.42@66.4,30.25 66.709,30.25 66.75,30.209 71.087,30.209 71.705,29.591 72.116,29.591 L1.2@72.275,29.432
TRX_P: L1.1 U2.43 | length 5.9
  Bottom Layer w0.218: U2.43@66.4,29.75 66.709,29.75 66.75,29.791 70.913,29.791 71.409,29.295 71.409,28.884 L1.1@71.568,28.725
TRX_TERM_N: C29.1 L1.3 | length 3.5
  Bottom Layer w0.218: L1.3@74.432,27.275 74.591,27.116 74.591,26.705 76.079,25.217 76.259,25.217 76.391,25.348 76.712,25.348 C29.1@76.727,25.333
TRX_TERM_P: C28.1 L1.4 | length 3.5
  Bottom Layer w0.218: L1.4@73.725,26.568 73.884,26.409 74.295,26.409 75.783,24.921 75.783,24.741 75.652,24.609 75.652,24.288 C28.1@75.667,24.273
USB_CONN_N: D1.1 D1.10 J3.2 R15.1 | length 7.4
  Top Layer w0.283: R15.1@46.25,10.35 46.433,10.534 46.433,10.568 46.599,10.734 47.824,10.734 48.433,10.125 D1.10@48.433,9.426 ; J3.2@48.35,5.325 48.408,5.383 48.408,6.209 48.433,6.234 D1.1@48.433,8.574 ; D1.1@48.433,8.591 D1.10@48.433,9.409
USB_CONN_P: D1.2 D1.9 J3.3 R16.1 | length 8.2
  Top Layer w0.283: R16.1@46.25,11.6 46.433,11.417 46.433,11.382 46.599,11.217 48.025,11.217 48.916,10.325 D1.9@48.916,9.426 ; D1.2@48.916,8.574 48.916,6.234 48.941,6.209 48.941,5.383 J3.3@49,5.325 ; D1.2@48.916,8.591 D1.9@48.916,9.409
USB_MCU_N: R15.2 U5.12 | length 7.7
  Top Layer w0.283: U5.12@37.775,10.65 37.778,10.653 38.341,10.653 38.421,10.734 41.794,10.734 44.901,10.734 45.066,10.568 45.066,10.534 R15.2@45.25,10.35
USB_MCU_P: R16.2 U5.13 | length 7.7
  Top Layer w0.283: U5.13@37.775,11.3 37.778,11.297 38.341,11.297 38.421,11.217 41.594,11.217 44.901,11.217 45.066,11.382 45.066,11.417 R16.2@45.25,11.6
VDDIO_8830: C9.1 C10.1 C11.1 C12.1 C13.1 C14.1 R17.1 R19.1 R20.1 R21.1 R31.2 U1.17 U1.24 U1.28 U1.35 U1.41 | length 30
  Top Layer w0.25: v2(35.5,34.945) 35.5,34.878 35.75,34.628 U1.41@35.75,33.4 ; U1.24@37.75,26.6 37.75,26.3 38.5,25.55 v2(38.5,25.5) ; U1.28@38.4,28.75 39.25,28.75 39.375,28.625 39.996,28.625 v2(40,28.621) ; U1.35@38.4,32.25 40.182,32.25 40.432,32.5 v2(40.5,32.5)
  Top Layer w0.254: v2(34.25,25) U1.17@34.25,26.6
  Top Layer w0.3: R19.1@30.25,19.85 30.325,19.85 31.425,18.75 33.825,18.75 34.925,19.85 35.075,19.85 35.727,20.502 35.727,22.073 34.25,23.55 v2(34.25,25)
  Bottom Layer w0.3: C14.1@35.25,34.729 R17.1@35.25,36.35 ; C13.1@39.729,32.25 39.915,32.436 40.382,32.436 40.446,32.5 v2(40.5,32.5) 45,37 R21.1@45.85,37
pads on no net: D1.4 D1.5 D1.6 D1.7 D4.1 D4.5 D4.6 D4.10 J1. J3.4 U2.40 U4.5 U5.6 U5.7 U5.8 U5.9 U5.10 U5.14 U5.19 U5.21

## Polygon pours and split planes (outlines as drawn)
GND on Top Layer "GND_L01_P057" (solid, remove dead copper, pour order 57): -1,3 -1,37 cw(c2,37) 2,40 92,40 cw(c92,37) 95,37 95,3 cw(c92,3) 92,0 2,0 cw(c2,3)
3V3 on Top Layer "3V3_L01_P004" (solid, pour order 4): 35.25,12.25 35.25,14.75 36,14.75 36,12.25
NetC66_1 on Top Layer "NETC66_1_L01_P000" (solid, pour order 0): 37.25,10.25 39.75,10.25 39.75,9.25 38.25,9.25 38.25,9.5 37.25,9.5
3V3 on Top Layer "3V3_L01_P014" (solid, remove dead copper, pour order 14): 62.5,13.75 62,13.75 62,15.5 64.5,15.5 64.5,13.75 64,13.75 64,11 63.5,11 63.5,7 72,7 72,3 61,3 61,5.5 62.5,5.5
RJ45_GND on Top Layer "RJ45_GND_L01_P012" (solid, remove dead copper, pour order 12): -1,30 20,30 20,10 -1,10
NetF1_1 on Top Layer "NETF1_1_L01_P008" (solid, pour order 8): 48,4.5 48,7 46.75,7 46.75,4.5
NetC44_1 on Top Layer "NETC44_1_L01_P009" (solid, pour order 9): 67.25,27 68.5,27 68.5,29.5 67.25,29.5
LAN8870_VDDA on Top Layer "LAN8870_VDDA_L01_P055" (solid, pour order 55): 69.75,27 68.5,27 68.5,30.5 67.25,30.5 67.25,31.5 69.75,31.5
LAN8870_VDDA on Top Layer "LAN8870_VDDA_L01_P050" (solid, pour order 50): 69.25,34.25 66.5,34.25 66.5,36.75 68,36.75 68,35.25 69.25,35.25
NetC48_1 on Top Layer "NETC48_1_L01_P044" (solid, pour order 44): 57.5,31.75 56.25,31.75 56.25,27.5 57.5,27.5
LAN8870_VDDIO on Top Layer "LAN8870_VDDIO_L01_P040" (solid, pour order 40): 59.75,25.75 59.75,26.75 56.25,26.75 56.25,23.25 58.5,23.25 58.5,24.5 57.25,24.5 57.25,25.75
NetC40_1 on Top Layer "NETC40_1_L01_P019" (solid, pour order 19): 61.25,25.75 61.25,23.25 58.5,23.25 58.5,24.5 60.25,24.5 60.25,25.75
NetC38_1 on Top Layer "NETC38_1_L01_P018" (solid, pour order 18): 64.5,24.5 64.5,23.25 61.75,23.25 61.75,25.75 63.25,25.75 63.25,24.5
NetC44_1 on Top Layer "NETC44_1_L01_P017" (solid, pour order 17): 63.25,25.75 63.25,24.5 65.5,24.5 65.5,23.25 67,23.25 67,25.75
LAN8870_VBAT on Top Layer "LAN8870_VBAT_L01_P016" (solid, pour order 16): 67.25,26.5 69.75,26.5 69.75,23.75 68.5,23.75 68.5,25.5 67.25,25.5
1V1 on Top Layer "1V1_L01_P015" (solid, remove dead copper, pour order 15): 71.5,23.25 65.5,23.25 65.5,22 60,22 60,23.25 58.5,23.25 58.5,22 56.25,22 56.25,29 55,29 55,20 69.5,20 69.5,13.5 69.5,8 71,8 71,10.5 71.5,10.5
NetC61_1 on Top Layer "NETC61_1_L01_P013" (solid, remove dead copper, pour order 13): 57,8 61.5,8 61.5,13.5 60,13.5 60,11.5 57,11.5
MATENET_GND on Top Layer "MATENET_GND_L01_P010" (solid, remove dead copper, pour order 10): 81,26 95,26 95,14 81,14
GND on Mid Layer 1 "GND_L02_P048" (solid, remove dead copper, pour order 48): -1,3 -1,37 cw(c2,37) 2,40 92,40 cw(c92,37) 95,37 95,3 cw(c92,3) 92,0 2,0 cw(c2,3)
LAN8870_VDDA on Mid Layer 1 "LAN8870_VDDA_L02_P043" (solid, pour order 43): 67.5,26 64.5,23 64.5,22.5 64,22 63.25,22 63.25,23.5 67.25,27.5 68,27.5 68.5,28 68.5,29.75 66.75,31.5 66.75,35.5 67.5,35.5 70.5,32.5 70.5,27.75 69.25,26.5 68,26.5
LAN8870_VDDIO on Mid Layer 1 "LAN8870_VDDIO_L02_P007" (solid, pour order 7): 59.75,33 66.75,33 66.75,35.5 63.25,35.5 62.25,34.5 57.75,34.5 57.75,30 57.25,30 57.25,28.5 52,28.5 52,26 59.75,26
RJ45_GND on Mid Layer 1 "RJ45_GND_L02_P047" (solid, remove dead copper, pour order 47): -1,30 20,30 20,10 -1,10
NetC40_1 on Mid Layer 1 "NETC40_1_L02_P002" (solid, pour order 2): 57.75,29.75 55.75,29.75 55.75,35.5 62.25,35.5 62.25,34.5 57.75,34.5
NetC44_1 on Mid Layer 1 "NETC44_1_L02_P045" (solid, pour order 45): 68,27.5 68.5,28 68.5,29.75 67.5,29.75 63.25,25.5 63.25,24.5 64.25,24.5 67.25,27.5
MATENET_GND on Mid Layer 1 "MATENET_GND_L02_P046" (solid, remove dead copper, pour order 46): 81,26 95,26 95,14 81,14
1V1 on Mid Layer 2 "1V1_L03_P052" (solid, pour order 52): 54.75,19.75 56.75,21.75 57.5,21.75 57.5,18 25,18 25,30.5 23.75,30.5 23.75,32.25 27,32.25 27,21.75 39.75,21.75 39.75,20.25 49.75,20.25 49.75,19.75
GND on Mid Layer 2 "GND_L03_P054" (solid, remove dead copper, pour order 54): -1,3 -1,37 cw(c2,37) 2,40 92,40 cw(c92,37) 95,37 95,3 cw(c92,3) 92,0 2,0 cw(c2,3)
RJ45_GND on Mid Layer 2 "RJ45_GND_L03_P049" (solid, remove dead copper, pour order 49): -1,30 20,30 20,10 -1,10
3V3 on Mid Layer 2 "3V3_L03_P053" (solid, pour order 53): 63.75,21.25 65.5,23 65.5,34.5 67.75,34.5 67.75,35.5 66.75,35.5 66.75,38 69.75,38 69.75,32.5 67.5,32.5 67.5,25.5 71,25.5 71,23.5 64.5,17 64.5,13.75 62,13.75 62,17.5 57.25,22.25 57.25,23 58.75,23 60.5,21.25
NetC15_1 on Mid Layer 2 "NETC15_1_L03_P006" (solid, pour order 6): 36,35.5 36,33.5 41,33.5 41,32 40.5,32 40.5,25 38,25 38,26 36,26 36,23 42.5,23 42.5,30 43,30 43,35.5
VDDIO_8830 on Mid Layer 2 "VDDIO_8830_L03_P029" (solid, pour order 29): 40.5,25 38,25 38,26 35,26 35,24.5 33.5,24.5 33.5,27.5 39,27.5 39,32.5 35,32.5 35,35.5 36,35.5 36,33.5 41,33.5 41,32 40.5,32
NetC22_1 on Mid Layer 2 "NETC22_1_L03_P003" (solid, pour order 3): 29.5,28 29.5,26.5 31.75,26.5 31.75,33.75 29.5,33.75 29.5,32.25 30.5,32.25 30.5,28
NetC40_1 on Mid Layer 2 "NETC40_1_L03_P030" (solid, pour order 30): 60.5,27.25 61.5,26.25 61.5,24.5 60.5,24.5 60.5,25.75 57,29.25 57,30.75 57.75,30.75 60.5,28
MATENET_GND on Mid Layer 2 "MATENET_GND_L03_P042" (solid, remove dead copper, pour order 42): 81,26 95,26 95,14 81,14
GND on Bottom Layer "GND_L04_P058" (solid, remove dead copper, pour order 58): -1,3 -1,37 cw(c2,37) 2,40 92,40 cw(c92,37) 95,37 95,3 cw(c92,3) 92,0 2,0 cw(c2,3)
MATENET_GND on Bottom Layer "MATENET_GND_L04_P021" (solid, remove dead copper, pour order 21): 81,26 95,26 95,14 81,14
3V3 on Bottom Layer "3V3_L04_P056" (solid, pour order 56): 36.25,13.75 33.5,13.75 33.5,16.5 31.75,18.25 31.75,20.75 25.75,20.75 25.75,27.75 22,27.75 22,32 17,32 13,36 10.25,36 10.25,38 12.5,38 17.25,33.25 23,33.25 23,29.25 28.25,29.25 28.25,27.75 27,27.75 27,22.25 35,22.25 35,23.25 36.5,23.25 36.5,20.25 44.25,12.5 62,12.5 62,15.5 64.5,15.5 64.5,8.25 41.5,8.25 41.5,8.75 40,8.75 40,10
3V3 on Bottom Layer "3V3_L04_P001" (solid, pour order 1): 28.75,18.25 33.5,18.25 33.5,15.5 30,15.5 30,5 28.75,5 28.75,6.5 26.5,6.5 26.5,8.5 28.75,8.5
NetF1_1 on Bottom Layer "NETF1_1_L04_P020" (solid, pour order 20): 46.5,7.25 59,7.25 59,4.5 46.5,4.5
1V1 on Bottom Layer "1V1_L04_P034" (solid, pour order 34): 26.25,30.5 23.75,30.5 23.75,32.25 26.25,32.25 26.25,36.75 30.75,36.75 30.75,35.25 27.75,35.25 27.75,30.75 28.25,30.75 28.25,29.25 26.25,29.25
NetC66_1 on Bottom Layer "NETC66_1_L04_P005" (solid, pour order 5): 38.5,10 38.5,7.5 41.5,7.5 41.5,8.75 40,8.75 40,10
RJ45_GND on Bottom Layer "RJ45_GND_L04_P022" (solid, remove dead copper, pour order 22): -1,30 20,30 20,10 -1,10
3V3 on Bottom Layer "3V3_L04_P051" (solid, pour order 51): 83.75,32 82,32 82,30 83.75,30
3V3 on Bottom Layer "3V3_L04_P041" (solid, pour order 41): 83.75,35 82,35 82,33 83.75,33
3V3 on Bottom Layer "3V3_L04_P037" (solid, pour order 37): 83.75,38 82,38 82,37 83.75,37
1V1 on Bottom Layer "1V1_L04_P035" (solid, pour order 35): 39.75,23.25 37.75,23.25 37.75,20.75 39.75,20.75
NetC15_1 on Bottom Layer "NETC15_1_L04_P031" (solid, pour order 31): 42.75,29.75 41.5,29.75 41.5,23.25 36.5,23.25 36.5,24.75 37,24.75 37,26 38,26 38,24.75 40.5,24.75 40.5,26.75 39.25,26.75 39.25,27.75 40.5,27.75 40.5,29.75 39.25,29.75 39.25,30.75 42.75,30.75
VDDIO_8830 on Bottom Layer "VDDIO_8830_L04_P027" (solid, pour order 27): 36.5,23.25 36.5,24.75 34.75,24.75 34.75,25.75 33.75,25.75 33.75,23.25
NetC22_1 on Bottom Layer "NETC22_1_L04_P025" (solid, pour order 25): 30.75,28 30.75,26.5 28.25,26.5 28.25,29.25 29.5,29.25 29.5,28
NetC25_1 on Bottom Layer "NETC25_1_L04_P024" (solid, pour order 24): 30.75,32 30.75,28 29.5,28 29.5,29.25 28.25,29.25 28.25,30.75 29.5,30.75 29.5,32
NetC20_1 on Bottom Layer "NETC20_1_L04_P023" (solid, pour order 23): 33.25,34.25 32.25,34.25 32.25,34 30.75,34 30.75,36.75 33.25,36.75

## Other copper
Top Layer:
  pour cut-out: -1,30 -1,31 21,31 21,9 -1,9 -1,10 20,10 20,30
  pour cut-out: 95,26 95,27 80,27 80,13 95,13 95,14 81,14 81,26
Mid Layer 1:
  pour cut-out: -1,30 -1,31 21,31 21,9 -1,9 -1,10 20,10 20,30
  pour cut-out: 95,26 95,27 80,27 80,13 95,13 95,14 81,14 81,26
Mid Layer 2:
  pour cut-out: -1,30 -1,31 21,31 21,9 -1,9 -1,10 20,10 20,30
  pour cut-out: 95,26 95,27 80,27 80,13 95,13 95,14 81,14 81,26
Bottom Layer:
  pour cut-out: -1,30 -1,31 21,31 21,9 -1,9 -1,10 20,10 20,30
  pour cut-out: 95,26 95,27 80,27 80,13 95,13 95,14 81,14 81,26

## Silkscreen, mask and mechanical layers (free items; w line width, h text height)
Top Overlay:
  text "LDO_O" at 29.885,37.083 h1
  text "CLK" at 31.884,35.5 h1
  text "MAGJ" at 29.917,22.2 h1
Bottom Overlay:
  text "LINK/RST" at 19.723,36.5 h1
  text "MCU" at 81.775,36.5 h1
  text "LED2/LED3" at 81.775,33.5 h1
  text "LINK/RST" at 81.775,30.5 h1
  text "PGC" at 25.55,14.5 h1
  text "PGD" at 25.55,12 h1
  text "MANAGED" at 46.25,11.8 h1 r90
  text "AUTO_NEG" at 50.167,11.8 h1 r90
  text "SPEED" at 54.25,11.8 h1 r90
  text "SLAVE" at 58.25,11.8 h1 r90
  text "GND" at 25.55,9.5 h1
  text "LAN8870 EVAL" at 87.6,8.4 h2
  text "3V3" at 25.55,7 h1
  text "Project:" at 87.75,6.383 h1
  text "BRZ" at 78.8,6.2 h1
  text "nMCLR" at 25.55,4.5 h1
  text "Revision:" at 87.75,4.5 h1
  text "A" at 78.8,4.45 h1
  text "MCU / RST" at 17.25,3.46 h1
  text "Date:" at 87.75,2.75 h1
  text "29/12/2025" at 78.8,2.7 h1
Mechanical 1:
  the board outline again, w0.254